# EAGLE board ornithopter001 (EAGLE 6.2)
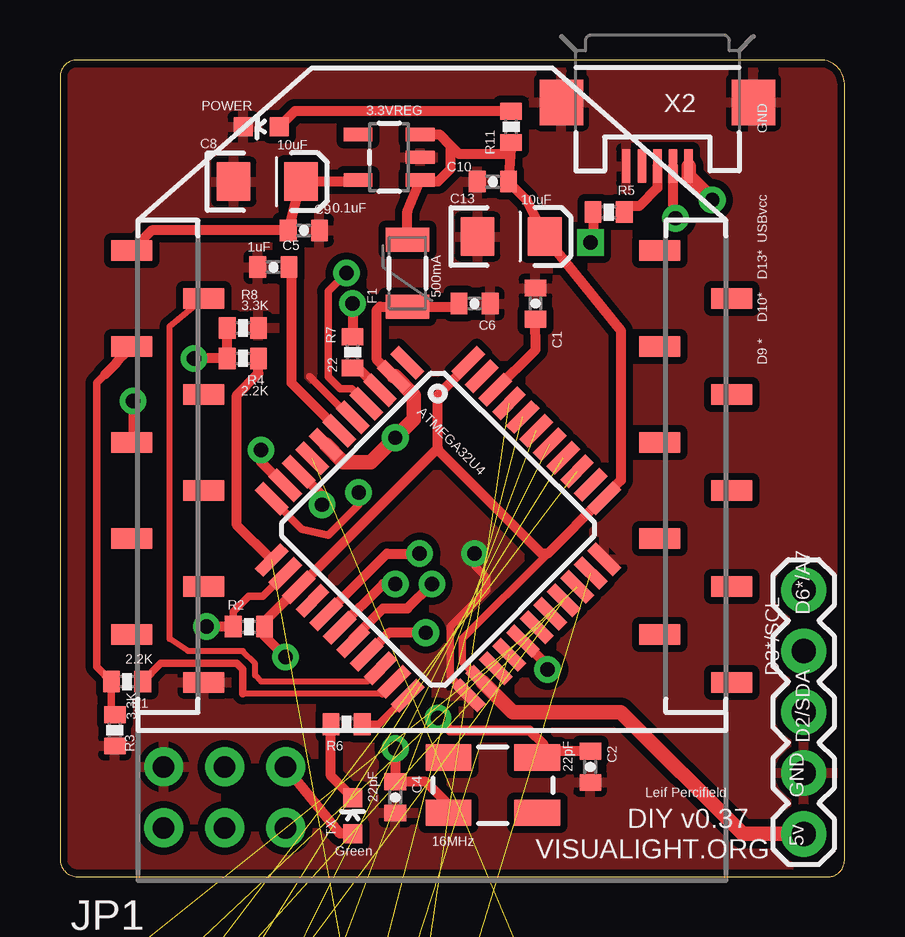
[diagram p0: board, top side]
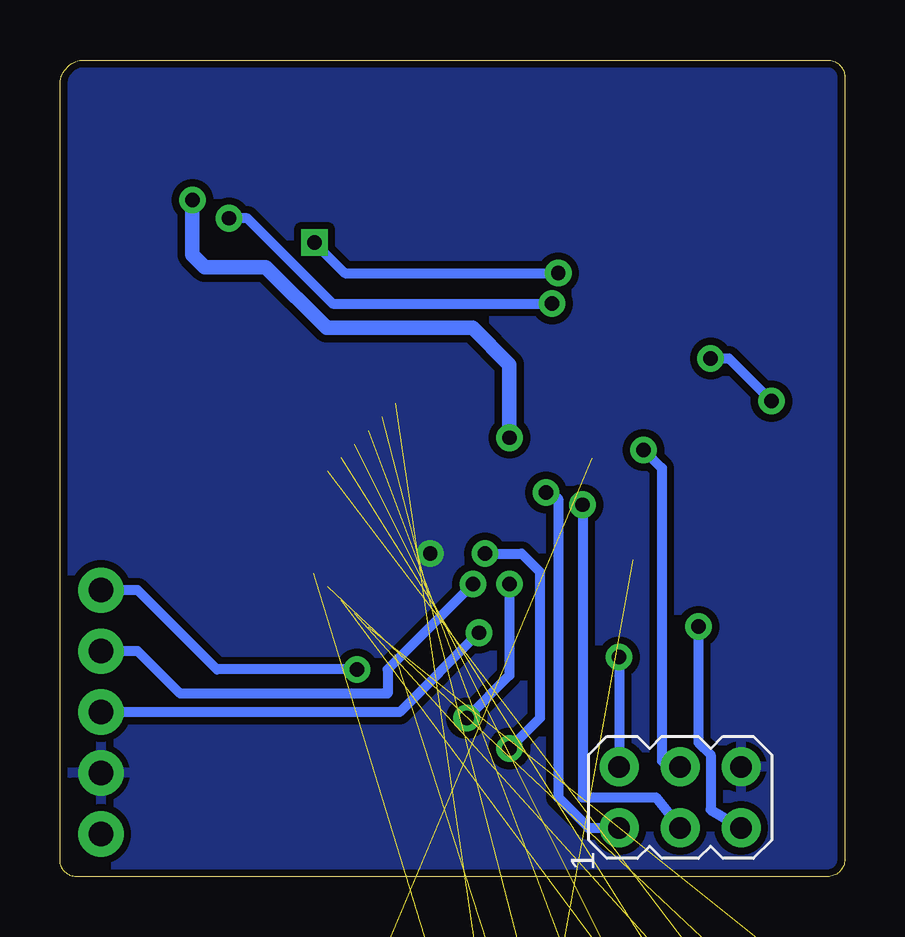
[diagram p1: board, bottom side, seen from below]

Size 32.7 x 34.03 mm. Coordinates in mm from the lower left corner, seen from the top.
Outline: 0,0.72 arc90 0.72,0 32.02,0 arc90 32.69,0.67 32.69,32.86 arc90 31.78,34.03 0.71,34.03 arc90 0,33.32 0,0.72
Copper layers (1*16): Top 0.035mm / dielectric 1.5mm / Bottom 0.035mm
Design rules: minimum track width 8mil, minimum drill 10mil, track to track 8mil, track to pad 8mil, pad to pad 8mil, via to via 8mil, smd to smd 8mil, copper to edge 10mil, drill to drill 8mil, minimum pad ring 12mil, minimum via ring 10mil, stop-mask expansion 4mil, vias tented up to drill 25mil, thermal gap 10mil
Net classes: 0 default: width 0.003 mm, drill 0.254 mm, clearance 0.152 mm

## Footprints (pad centres in the part's own frame; a part is rotated, then mirrored left to right if it is on the bottom)
SOT23-5 = smd 0.55 x 1.2: 1 -0.95,-1.3; 2 0,-1.3; 3 0.95,-1.3; 4 0.95,1.3; 5 -0.95,1.3
SPARKFUN-DIGITALIC_TQFP44 = smd 1.5 x 0.5: 1 -5.8,4; 2 -5.8,3.2; 3 -5.8,2.4; 4 -5.8,1.6; 5 -5.8,0.8; 6 -5.8,0; 7 -5.8,-0.8; 8 -5.8,-1.6; 9 -5.8,-2.4; 10 -5.8,-3.2; 11 -5.8,-4; 23 5.8,-4; 24 5.8,-3.2; 25 5.8,-2.4; 26 5.8,-1.6; 27 5.8,-0.8; 28 5.8,0; 29 5.8,0.8; 30 5.8,1.6; 31 5.8,2.4; 32 5.8,3.2; 33 5.8,4 | smd 0.5 x 1.5: 12 -4,-5.8; 13 -3.2,-5.8; 14 -2.4,-5.8; 15 -1.6,-5.8; 16 -0.8,-5.8; 17 0,-5.8; 18 0.8,-5.8; 19 1.6,-5.8; 20 2.4,-5.8; 21 3.2,-5.8; 22 4,-5.8; 34 4,5.8; 35 3.2,5.8; 36 2.4,5.8; 37 1.6,5.8; 38 0.8,5.8; 39 0,5.8; 40 -0.8,5.8; 41 -1.6,5.8; 42 -2.4,5.8; 43 -3.2,5.8; 44 -4,5.8
0402-CAP = smd 0.7 x 0.9: 1 -0.65,0; 2 0.65,0
EIA3216 = smd 1.4 x 1.6: A 1.4,0; C -1.4,0
PTC-1206 = smd 1 x 1.8: 1 -1.4,0; 2 1.4,0
AVRISP = drill 0.9 pad 1.626: 1 -1.27,2.54; 2 1.27,2.54; 3 -1.27,0; 4 1.27,0; 5 -1.27,-2.54; 6 1.27,-2.54
1X08 = drill 1.016 pad 1.88 square: 1 0,0 | drill 1.016 pad 1.88: 2 2.54,0; 3 5.08,0; 4 7.62,0; 5 10.16,0; 6 12.7,0; 7 15.24,0; 8 17.78,0
1X05 = drill 1.016 pad 1.88: 1 0,0; 2 2.54,0; 3 5.08,0; 4 7.62,0; 5 10.16,0
LED-0603 = smd 0.8 x 0.8: A 0,-0.75; C 0,0.75
0402-RES = smd 0.7 x 0.9: 1 -0.65,0; 2 0.65,0
XBEE-SMD = smd 1.7 x 0.85: 1 -12.5,20; 2 -9.5,18; 3 -12.5,16; 4 -9.5,14; 5 -12.5,12; 6 -9.5,10; 7 -12.5,8; 8 -9.5,6; 9 -12.5,4; 10 -9.5,2; 11 12.5,2; 12 9.5,4; 13 12.5,6; 14 9.5,8; 15 12.5,10; 16 9.5,12; 17 12.5,14; 18 9.5,16; 19 12.5,18; 20 9.5,20
USB-MICROB = smd 0.35 x 1.4: D+ 0,2.65; D- -0.65,2.65; GND 1.3,2.65; ID 0.65,2.65; VBUS -1.3,2.65 | smd 1.8 x 1.9: MT1 -4,0; MT2 4,0
CRYSTAL-SMD-5X3 = smd 1.9 x 1.1: 1 -1.85,-1.15; 2 1.85,-1.15; 3 1.85,1.15; 4 -1.85,1.15

## Placement (x,y rotation side)
3.3VREG  MIC5219 3.3V  [SOT23-5]  13.72,29.97 90 top
ATMEGA32U4  ATMEGA32U4  [SPARKFUN-DIGITALIC_TQFP44]  15.75,14.48 315.1 top
C1  0.1uF  [0402-CAP]  19.81,23.88 270 top
C2  22pF  [0402-CAP]  22.1,4.57 270 top
C4  22pF  [0402-CAP]  13.97,3.3 270 top
C5  1uF  [0402-CAP]  8.89,25.4 0 top
C6  1uF  [0402-CAP]  17.27,23.88 180 top
C8  10uF  [EIA3216]  8.64,28.96 0 top
C9  0.1uF  [0402-CAP]  10.16,26.92 180 top
C10  1uF  [0402-CAP]  18.03,28.96 180 top
C13  10uF  [EIA3216]  18.8,26.67 0 top
F1  500mA  [PTC-1206]  14.48,25.15 90 top
ISP1  AVRISP-6  [AVRISP]  6.86,3.3 90 bottom
JP1  [1X08]  1.78,-4.06 0 top  (outside the outline)
JP2  [1X05]  30.99,1.78 90 top
JP3  [1X08]  1.78,-9.14 0 top  (outside the outline)
POWER  Red  [LED-0603]  8.38,31.24 90 top
R1  2.2K  [0402-RES]  2.79,8.13 180 top
R2  10K  [0402-RES]  7.87,10.41 0 top
R3  3.3K  [0402-RES]  2.29,6.1 90 top
R4  2.2K  [0402-RES]  7.62,21.59 180 top
R5  22  [0402-RES]  22.86,27.69 0 top
R6  330  [0402-RES]  11.94,6.35 180 top
R7  22  [0402-RES]  12.19,21.84 90 top
R8  3.3K  [0402-RES]  7.62,22.86 180 top
R11  1K  [0402-RES]  18.8,31.24 270 top
TX  Green  [LED-0603]  12.19,2.54 0 top
U$1  XBEE-1B3  [XBEE-SMD]  15.49,6.1 0 top
X2  USB-MICROB  [USB-MICROB]  24.89,32.26 180 top
Y1  16MHz  [CRYSTAL-SMD-5X3]  18.03,3.81 0 top

## Library data of the parts
3.3VREG = SparkFun-PowerIC; PROD_ID: VREG-09872
ATMEGA32U4 = SparkFun-DigitalIC
C1 C2 C4-C6 C8-C10 C13 F1 POWER R1-R8 R11 TX Y1 = SparkFun
ISP1 = adafruit
JP1-JP3 = SparkFun-Connectors
U$1 = SparkFun-RF; PROD_ID: CONN-09042
X2 = SparkFun-Connectors; PROD_ID: CONN-09505

## Nets
+3V3_OUT: 3.3VREG.5 C8.A C9.2 U$1.1
A0: ATMEGA32U4.36 JP3.1
A1: ATMEGA32U4.37 JP3.2
A2: ATMEGA32U4.38 JP3.3
A3: ATMEGA32U4.39 JP3.4
A4: ATMEGA32U4.40 JP3.5
A5: ATMEGA32U4.41 JP3.6
AREF: ATMEGA32U4.42 C1.2
D2: ATMEGA32U4.19 JP2.3
D3: ATMEGA32U4.18 JP2.4
D4: ATMEGA32U4.25
D5: ATMEGA32U4.31 JP1.2
D6: ATMEGA32U4.27 JP2.5
D7: ATMEGA32U4.1
D8: ATMEGA32U4.28 JP1.1
D9: ATMEGA32U4.29 JP1.3
D10: ATMEGA32U4.30 JP1.4
D11: ATMEGA32U4.12 JP1.5 R4.1
D12: ATMEGA32U4.26 JP1.6
D13: ATMEGA32U4.32 JP1.7
D17: ATMEGA32U4.8 JP1.8
D+: ATMEGA32U4.4 R5.1
D-: ATMEGA32U4.3 R7.1
GND [vcc]: 3.3VREG.2 ATMEGA32U4.5 ATMEGA32U4.15 ATMEGA32U4.23 ATMEGA32U4.33 ATMEGA32U4.35 ATMEGA32U4.43 C1.1 C2.2 C4.2 C5.1 C6.1 C8.C C9.1 C10.2 C13.C ISP1.6 JP2.2 POWER.C R3.1 R8.1 U$1.10 X2.GND X2.MT1 X2.MT2
MISO: ATMEGA32U4.11 ISP1.1
MOSI: ATMEGA32U4.10 ISP1.4
N$1: ATMEGA32U4.16 C4.1 Y1.1
N$2: ATMEGA32U4.17 C2.1 Y1.3
N$4: ATMEGA32U4.6 C5.2
N$6: R7.2 X2.D-
N$7: R6.2 TX.C
N$8: R5.2 X2.D+
N$27: JP3.7
N$28: JP3.8
N$38: POWER.A R11.1
RESET: ATMEGA32U4.13 ISP1.5 R2.1
SCK: ATMEGA32U4.9 ISP1.3
TX: ATMEGA32U4.21 R1.1
TXLED: ATMEGA32U4.22 R6.1
UVCC: ATMEGA32U4.2 ATMEGA32U4.7 C6.2 F1.1 X2.VBUS
VCC: 3.3VREG.1 3.3VREG.3 ATMEGA32U4.14 ATMEGA32U4.24 ATMEGA32U4.34 ATMEGA32U4.44 C10.1 C13.A F1.2 ISP1.2 JP2.1 R2.2 R11.2 TX.A
WIFIDIN: R1.2 R3.2 U$1.3
WIFIDOUT: ATMEGA32U4.20 U$1.2
WIFIRESET: R4.2 R8.2 U$1.5

## Tracks (layer width: path | path; a pad name or v marks a point on that pad's centre or on a via)
+3V3_OUT
  Top 0.406: 3.3VREG.5 12.35,28.96 C8.A 10.02,28.94 C9.2 3.82,26.92 U$1.1
A0  (1 unrouted)
A1  (1 unrouted)
A2  (1 unrouted)
A3  (1 unrouted)
A4  (1 unrouted)
A5  (1 unrouted)
AREF
  Top 0.406: ATMEGA32U4.42 19.82,21.96 C1.2
D2  (via drill 0.6)
  Top 0.406: ATMEGA32U4.19 13.71,10.16 v15.24,10.16
  Bottom 0.406: v15.24,10.16 18.54,6.86 JP2.3
D3  (via drill 0.6)
  Top 0.406: ATMEGA32U4.18 12.22,9.94 13.46,11.18 14.48,11.18 v15.49,12.19
  Bottom 0.406: v15.49,12.19 19.05,8.64 19.05,7.62 27.69,7.62 29.46,9.4 JP2.4
D5  (1 unrouted)
D6  (via drill 0.6)
  Top 0.406: ATMEGA32U4.27 20.32,8.79 v20.32,8.64
  Bottom 0.406: v20.32,8.64 26.16,8.64 29.46,11.94 JP2.5
D8  (1 unrouted)
D9  (1 unrouted)
D10  (1 unrouted)
D11  (1 unrouted)
  Top 0.406: ATMEGA32U4.12 7.37,14.65 7.37,20.07 8.27,20.97 R4.1
D12  (1 unrouted)
D13  (1 unrouted)
D17  (1 unrouted)
D+  (via drill 0.6)
  Top 0.305: v11.94,25.15 11.18,24.38 11.18,20.83 11.68,20.32 12.15,20.32 ATMEGA32U4.4
  Top 0.406: R5.1 22.21,26.53 v22.1,26.42
  Bottom 0.406: v22.1,26.42 20.83,25.15 v11.94,25.15
D-
  Top 0.406: R7.1 12.41,21.19 ATMEGA32U4.3
GND  (via drill 0.6)
  Top 0.305: ATMEGA32U4.23 16.26,8.33 16.26,10.41 17.78,11.94 17.78,12.45 17.27,12.95 v17.27,13.46 | ATMEGA32U4.5 12.1,19.14 10.41,20.83
  pour Top (isolate 0.305): 0,34.04 32.77,34.04 32.77,-0.25 0,0
  pour Bottom (isolate 0.305): 0,34.04 32.77,34.04 32.77,-0.25 0,0
MISO  (via drill 0.6)
  Top 0.305: ATMEGA32U4.11 10.08,14.48 11.18,14.22 12.45,15.49 v12.45,16
  Bottom 0.406: v12.45,16 11.94,15.75 11.94,3.3 10.67,2.03 ISP1.1
MOSI  (via drill 0.6)
  Top 0.406: ATMEGA32U4.10 9.35,16.3 8.38,17.27 v8.38,17.78
  Bottom 0.406: v8.38,17.78 7.62,17.02 7.62,4.83 ISP1.4
N$1  (via drill 0.6)
  Top 0.406: Y1.1 16.18,3.01 15.24,3.95 C4.1 v13.97,5.33 | ATMEGA32U4.16 13.62,13.46 v14.99,13.46
  Bottom 0.406: v14.99,13.46 13.46,13.46 12.7,12.7 12.7,6.6 v13.97,5.33
N$2  (via drill 0.6)
  Top 0.406: C2.1 20.15,5.22 | 20.15,5.22 Y1.3 | ATMEGA32U4.17 13.46,12.19 v13.97,12.19 | v15.75,6.6 16.26,6.1 19.56,6.1 20.15,5.51 20.15,5.22
  Bottom 0.406: v13.97,12.19 13.97,8.38 v15.75,6.6
N$4
  Top 0.406: ATMEGA32U4.6 9.65,20.56 9.65,25.29 C5.2
N$6  (via drill 0.6)
  Top 0.406: v12.19,23.88 R7.2 | v25.65,27.43 25.54,27.54 X2.D-
  Bottom 0.406: v12.19,23.88 21.34,23.88 24.89,27.43 v25.65,27.43
N$7
  Top 0.406: TX.C 11.29,4.19 R6.2
N$8
  Top 0.406: X2.D+ 24.89,28.7 24.13,27.94 23.76,27.94 R5.2
N$38
  Top 0.406: R11.1 9.78,31.89 POWER.A
RESET  (via drill 0.6)
  Top 0.305: 7.22,10.47 7.22,11.03 7.87,11.68 8.44,11.68 ATMEGA32U4.13
  Top 0.406: 7.22,10.47 R2.1 v6.1,10.41
  Bottom 0.406: v6.1,10.41 6.1,5.59 5.59,5.08 5.59,2.79 ISP1.5
SCK  (via drill 0.6)
  Top 0.406: ATMEGA32U4.9 10.92,15.9 v10.92,15.49
  Bottom 0.406: v10.92,15.49 10.92,3.3 7.87,3.3 ISP1.3
TX
  Top 0.254: 13.43,7.62 7.62,7.62
  Top 0.305: ATMEGA32U4.21 13.43,7.62 | 7.62,7.62 7.62,8.64 7.37,8.89 4.21,8.89 R1.1
TXLED
  Top 0.305: R6.1 13.29,6.35 ATMEGA32U4.22
UVCC  (via drill 0.6)
  Top 0.406: ATMEGA32U4.2 13.21,21.53 13.21,23.62 13.33,23.75 F1.1 16.49,23.75 C6.2
  Top 0.61: ATMEGA32U4.7 11.81,17.27 12.95,17.27 v13.97,18.29 14.73,19.05 14.73,20.07 13.96,20.84 ATMEGA32U4.2 | v27.18,28.19 26.19,29.18 X2.VBUS
  Bottom 0.61: v13.97,18.29 13.97,21.34 15.49,22.86 21.59,22.86 24.13,25.4 26.67,25.4 27.18,25.91 v27.18,28.19
VCC  (via drill 0.6)
  Top 0.305: ATMEGA32U4.24 16.76,8.95 16.76,9.91 20.32,13.46
  Top 0.406: 15.71,17.82 ATMEGA32U4.14 8.52,10.63 R2.2 8.52,10.02 v9.4,9.14 | 15.71,17.82 15.75,17.86 15.75,20.07 17.01,21.33 ATMEGA32U4.44 | 15.75,17.78 20.07,13.46 20.32,13.46 22.62,15.76 ATMEGA32U4.34 22.67,15.82 23.37,16.51 23.37,22.74 C13.A 19.43,28.21 C10.1 R11.2 18.53,30.11 16.63,30.11 16.26,30.48 | F1.2 14.48,27.72 3.3VREG.1 15.08,28.96 15.75,28.96 16.26,29.46 16.26,30.48 | 3.3VREG.3 15.81,30.92 16.26,30.48 | 15.75,17.78 | 15.75,17.78 15.71,17.82 | TX.A 11.67,1.79 ISP1.2
  Top 0.61: JP2.1 28.45,1.78 23.37,6.86 18.86,6.86 ATMEGA32U4.24
  Bottom 0.406: v9.4,9.14 ISP1.2
WIFIDIN
  Top 0.305: R3.2 2.14,6.89 R1.2 1.52,8.75 1.52,20.57 2.64,21.69 2.64,21.74
  Top 0.406: U$1.3 2.64,21.74 2.49,21.59 2.29,21.34 1.89,20.94
WIFIDOUT
  Top 0.254: ATMEGA32U4.20 12.81,8.13 8.38,8.13 8.13,8.38 8.13,8.89 7.62,9.4 5.33,9.4 4.57,9.91 4.57,22.93 U$1.2
WIFIRESET  (via drill 0.6)
  Top 0.406: R8.2 R4.2 v5.59,21.59 | v3.05,19.81 3.05,18.15 U$1.5
  Bottom 0.406: v5.59,21.59 4.83,21.59 v3.05,19.81

## Text on the board
tPlace: GND | USBvcc | D13* | D10* | D9 * | D6*/A7 | D3*/SCL | D2/SDA | Leif Percifield | GND | DIY v0.37 | VISUALIGHT.ORG | 5v